# Altium PCB PCB_V1.PcbDoc
Units mil, origin at the board's own origin, x right, y up, seen from the top; angles counter-clockwise.
Board outline 1885.16 x 1885.16 mil, 2 copper layers (Top Layer, Bottom Layer); 25 components, 8 nets, 53 pads, 5 vias.
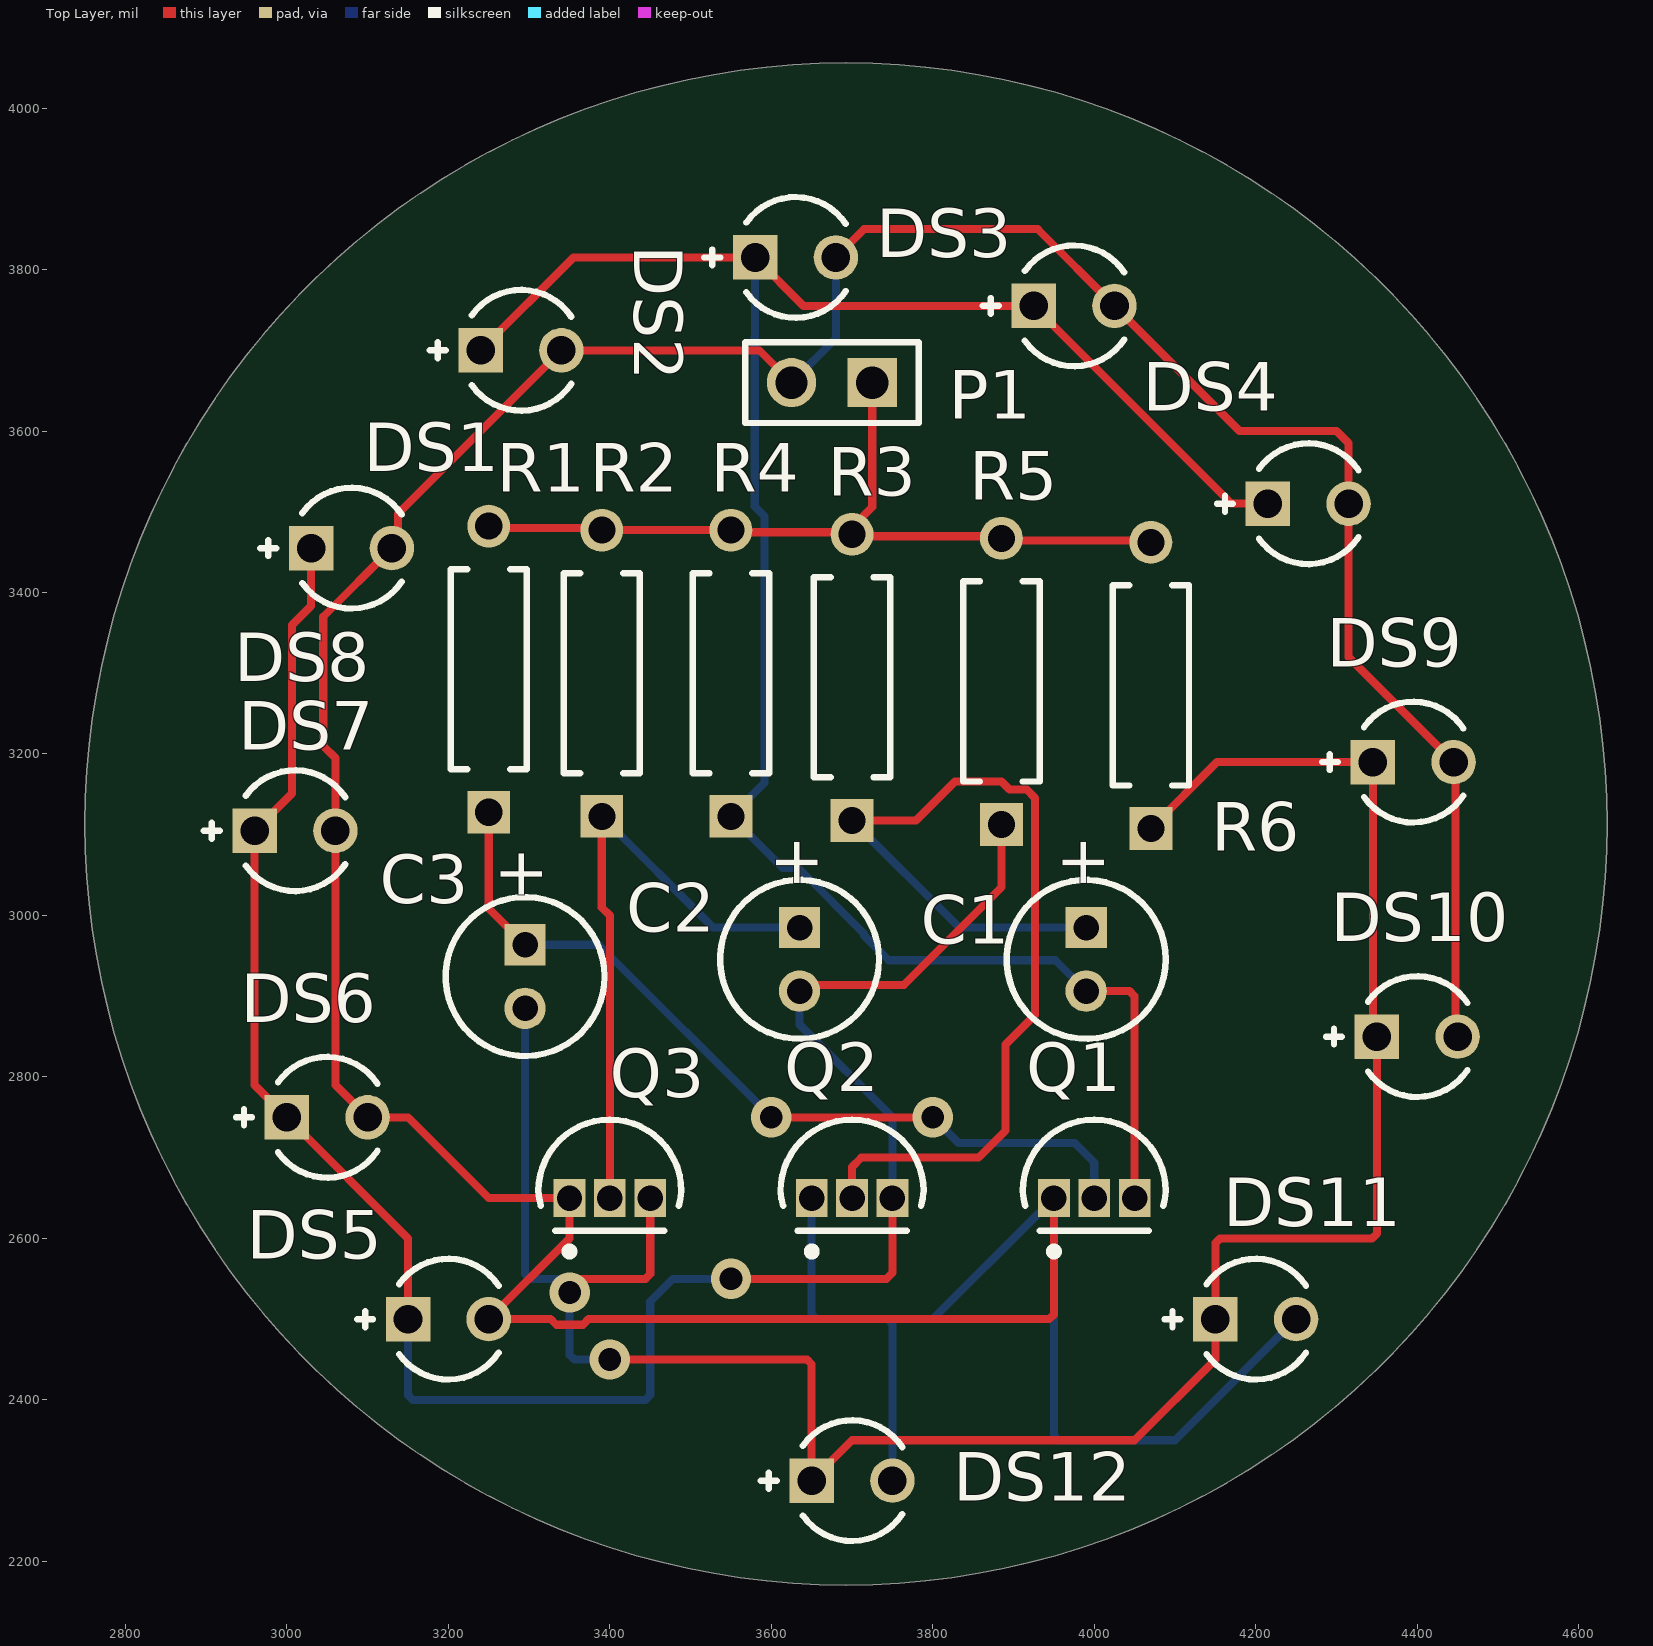
[diagram p0: Top Layer view]
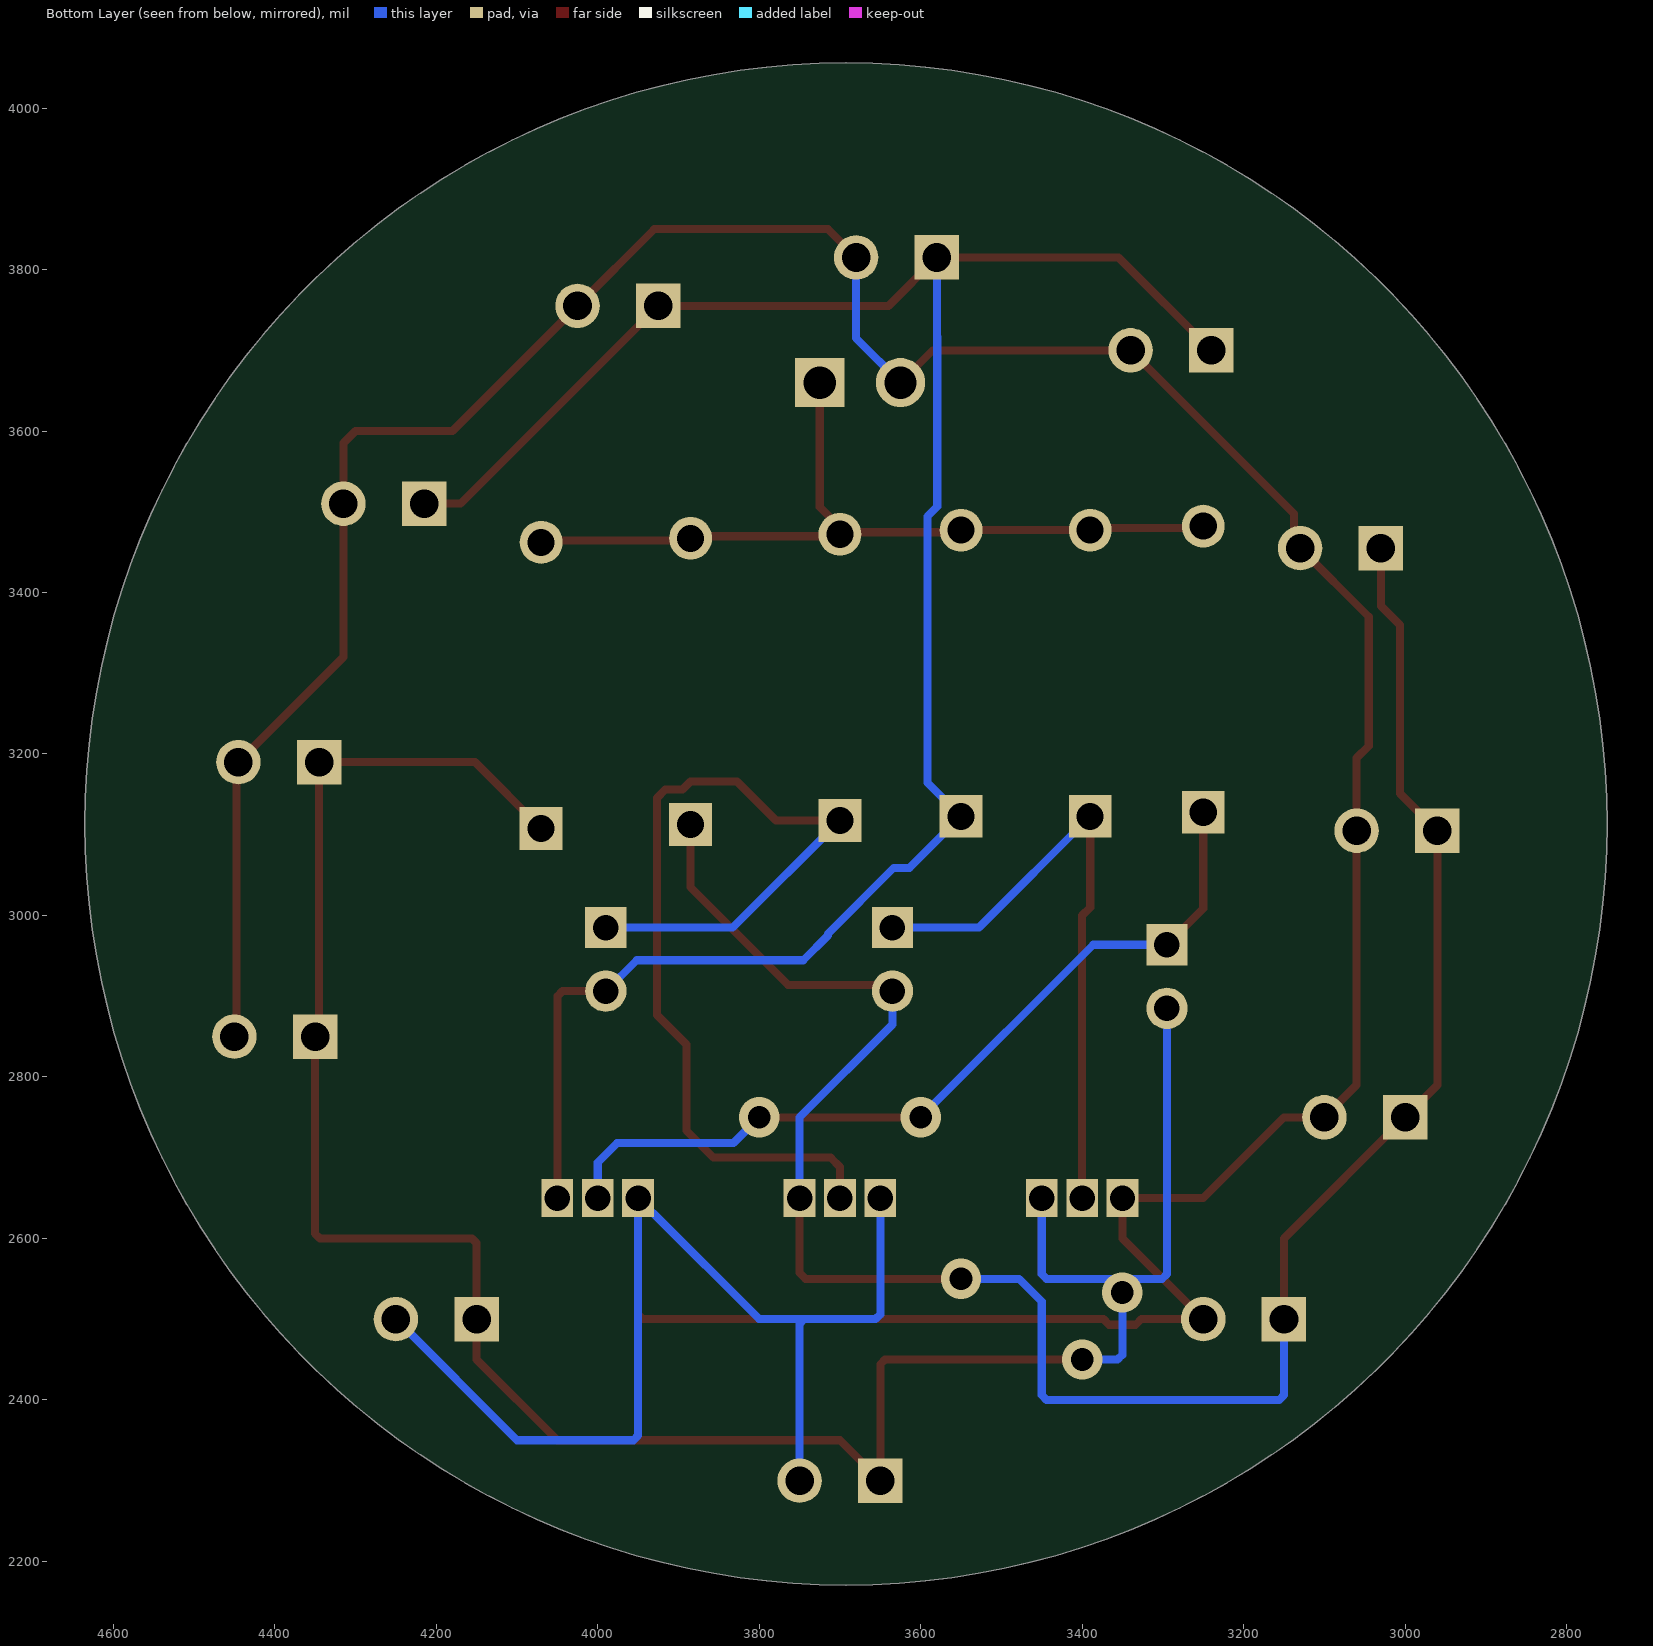
[diagram p1: Bottom Layer view, seen from below]

## Layer stack, top to bottom
Top Solder: solder mask 0.4, Solder Resist, Dk 3.5
Top Layer: signal copper 1.4
Dielectric 1: dielectric 12.6, FR-4, Dk 4.8
Bottom Layer: signal copper 1.4
Bottom Solder: solder mask 0.4, Solder Resist, Dk 3.5

## Board outline
2749.91,3113.29 ccw(c3692.49,3113.29) 3692.49,2170.71 ccw(c3692.49,3113.29) 4635.07,3113.29 ccw(c3692.49,3113.29) 3692.49,4055.87 ccw(c3692.49,3113.29)

## Design rules (kind name [scope] priority, off if disabled: settings)
Clearance [All] p1: gap=10 ignorepadtopadclearanceinfootprint=FALSE
PolygonConnect [All] p1: connectstyle=Relief reliefconductorwidth=10 reliefentries=4 polygonreliefangle="90 Angle" airgapwidth=10
RoutingVias [All] p1: holewidth=28 width=50 viastyle="Through Hole" minholewidth=28 minwidth=50 maxholewidth=28 maxwidth=50
SolderMaskExpansion [All] p1: expansion=4 istentingtop=FALSE
Width [All] p1: maxlimit=10 minlimit=10 preferedwidth=10
30 further rules are at their usual default settings.

## Components (designator, comment, footprint, x,y, rotation, side; value= is the part's Value field where it differs from the comment)
C1 "ECA1HM220" CAPPR55-200-1100X500X1200 3990,2945.63 r270 top value=22µF
C2 "ECA1HM220" CAPPR55-200-1100X500X1200 3635,2945.63 r270 top value=22µF
C3 "ECA1HM220" CAPPR55-200-1100X500X1200 3295,2924.37 r270 top value=22µF
DS1 "LTL-1CHE" INDPR60-254-520X380X650 3290,3700 r0 top
DS2 "LTL-1CHE" INDPR60-254-520X380X650 3630,3815 r0 top
DS3 "LTL-1CHE" INDPR60-254-520X380X650 3975,3755 r0 top
DS4 "LTL-1CHE" INDPR60-254-520X380X650 4265,3510 r0 top
DS5 "LTL-1CHE" INDPR60-254-520X380X650 3200,2500 r0 top
DS6 "LTL-1CHE" INDPR60-254-520X380X650 3050,2750 r0 top
DS7 "LTL-1CHE" INDPR60-254-520X380X650 3010,3105 r0 top
DS8 "LTL-1CHE" INDPR60-254-520X380X650 3080,3455 r0 top
DS9 "LTL-1CHE" INDPR60-254-520X380X650 4395,3190 r0 top
DS10 "LTL-1CHE" INDPR60-254-520X380X650 4400,2850 r0 top
DS11 "LTL-1CHE" INDPR60-254-520X380X650 4200,2500 r0 top
DS12 "LTL-1CHE" INDPR60-254-520X380X650 3700,2300 r0 top
P1 "TSW-102-26-F-S" SMTC-TSW-102-26-XX-S 3725,3660 r180 top
Q1 "S9013" JSCJ-TO-92-3_V 4000,2650 r0 top
Q2 "S9013" JSCJ-TO-92-3_V 3700,2650 r0 top
Q3 "S9013" JSCJ-TO-92-3_V 3400,2650 r0 top
R1 "MFR-25FBF52-10K" RESA60-630X240 3250,3305 r90 top value=10k
R2 "MFR-25FBF52-10K" RESA60-630X240 3390,3300 r90 top value=10k
R3 "MFR-25FBF52-10K" RESA60-630X240 3700,3295 r90 top value=10k
R4 "MFR-25FBF52-10K" RESA60-630X240 3550,3300 r90 top value=330R
R5 "" RESA60-630X240 3885,3290 r90 top value=330R
R6 "330R" RESA60-630X240 4070,3285 r90 top

## Footprints (in the part's own frame and the unit in brackets; to place one, negate y for a bottom-side part, rotate by r counter-clockwise, add the part's x,y. Pads: shape width x height; smd on the part's side, far side on the other; paste and mask are expansions set on the pad)
CAPPR55-200-1100X500X1200 [mm] "THD, 2-Leads, Dia 5mm, Pin Spacing 2mm"
  rect 1.3x1.3 hole 0.8: 1(-1,0)
  round 1.3 hole 0.8: 2(1,0)
  silkscreen extent -2.5,-2.5 2.5,2.5, body extent -2.5,-2.5 2.45,2.5, height 12
INDPR60-254-520X380X650 [mm] "THD, 2-Leads, Dia 3.8mm, Pitch 2.54mm"
  rect 1.4x1.4 hole 0.9: 1(-1.27,0)
  round 1.4 hole 0.9: 2(1.27,0)
  silkscreen extent -2.87,-1.9 1.58,1.9, body extent -1.9,-1.9 1.9,1.9, height 6.5
JSCJ-TO-92-3_V [mm] "TO-92, 3-leads, Height 4.7mm, Pitch 1.27mm"
  rect 1x1.2 hole 0.8: 1(-1.27,0) 2(0,0) 3(1.27,0)
  silkscreen extent -2.25,-1.81 2.25,2.47, body extent -2.25,-1.03 2.25,2.47, height 4.7
RESA60-630X240 [mm] "Axial Resistor, 2-Leads, Dia 2.4mm, Body Length 6.3mm"
  rect 1.35x1.35 hole 0.85: 1(-4.5,0)
  round 1.35 hole 0.85: 2(4.5,0)
  silkscreen extent -3.15,-1.2 3.15,1.2, body extent -4.77,-1.19 4.77,1.2, height 2.4
SMTC-TSW-102-26-XX-S [mm] ".025 SQ Post Terminal Strip Assembly, 1x2 Pins, Vertical, 2.54mm Pitch, Male"
  rect 1.55x1.55 hole 1.02: 1(0,0)
  round 1.55 hole 1.02: 2(2.54,0)
  silkscreen extent -1.46,-1.27 4,1.27, body extent -1.4,-1.27 3.81,1.27, height 8.38

## Part data
C1 C2 C3: library part CMP-001-00027-7, "Aluminum Electrolytic Capacitor, 22 uF, +/- 20%, 50 V, -40 to 85 degC, 2-Pin THD, RoHS, Bulk", Capacitor Type=Electrolytic, Case/Package=Radial, Manufacturer=Panasonic, Max Operating Temperature=85°C, Min Operating Temperature=-40°C, Package Description="2-Pin Radial Lead, Dia 5 mm, Height 12 mm", Package Quantity=200, Package Reference=CAPPR55-200-1100X500X1200, Ripple Current=100mA, Tolerance=20%, Voltage Rating=50V, Datasheet URL=https://industrial.panasonic.com/cdbs/www-data/pdf/RDF0000/ABA0000C1218.pdf, Datasheet Version="Rev. 05, 10/2016", Diameter=5mm, Lead Pitch=2mm, Manufacturer URL=http://www.panasonic.com/, Mounting Technology=TH, Packaging=Bulk, Pins=2, Ripple Current (AC)=100mA, RoHS Compliant=True
DS1 DS2 DS3 DS4 DS5 DS6 DS7 DS8 DS9 DS10 DS11 DS12: library part CMP-007-00018-2, "LED Uni-Color Red, 100 mW, 30 mA, -55 to 100 degC, 2-Pin THD, RoHS, Bulk", Case/Package=Radial, Colour=Red, Forward Current=20mA, Forward Voltage=2V, Manufacturer=Lite-On, Max Operating Temperature=100°C, Min Operating Temperature=-55°C, Package Description="2-Pin Through Hole Device, Dia 3.8 mm, Pitch 2.54 mm", Package Quantity=1000, Datasheet URL=https://datasheet.ciiva.com/15117/getdatasheetpartid-187746-15117985.pdf, Datasheet Version=Dec-03, Illumination Colour=Red, Lens Style=Dome, Luminous Intensity=12.6mcd, Manufacturer URL=http://www.us.liteon.com/, Mounting Technology=TH, Nominal Vf=2V, Package Reference=LTL-1CHE, Packaging=Bulk, Pins=2, RoHS Compliant=True, Viewing Angle=60degrees
P1: library part CMP-1024-00329-1, "0.025\" SQ Post Header, Through-hole, Vertical, -55 to 125 degC, 2.54 mm Pitch, 2-Pin, Male, RoHS", Manufacturer=Samtec, Temperature Range="-55 to 125 degC", ComponentLink1Description="Manufacturer URL", ComponentLink1URL=http://www.samtec.com, ComponentLink2Description=Datasheet, ComponentLink2URL=http://www.samtec.com/documents/webfiles/pdf/TSW_TH.PDF, ComponentLink3Description="Package Specification", ComponentLink3URL=http://www.samtec.com/documents/webfiles/cpdf/TSW-XXX-XX-XXX-X-XX-XXX-MKT.pdf, DatasheetVersion=F-214, Mounting Technology=Through-hole, Orientation=Vertical, PackageDescription=".025[0.64] SQ. Post Terminal Strip Assembly", PackageReference=TSW-102-26-XX-S, PackageVersion="DM, 8/1988", PartNumber=TSW-102-26-F-S, Pitch="2.54 mm", RoHS=True
Q1 Q2 Q3: library part CMP-013-00000-3, "Transistor, NPN, 0.1 uA, 150 MHz, 3-Pin TO-92", Case/Package=TO-92-3, Manufacturer="Jiangsu Changjiang Electronics Technology", Package Description="3-Pin Through Hole Device, Height 4.7 mm, Pitch 2.3 mm", Datasheet URL=http://www.cj-elec.com/txUpfile/20121910315050632.pdf, Datasheet Version="Rev. B, 11/2011", Mounting Technology=TH, Package Reference=TO-92-3, RoHS Compliant=False
R1 R2 R3 R4 R5 R6: library part CMP-009-00047-4, "Axial Resistor, 10 KOhm, +/- 1%, 0.25 W, -55 to 155 degC, 2-Pin THD, RoHS, Bulk", Case/Package=Axial, Manufacturer=Yageo, Max Operating Temperature=155°C, Min Operating Temperature=-55°C, Package Description="2-Pin Axial Lead, Dia 2.4 mm, Body Length 6.3 mm", Package Quantity=200, Package Reference=MFR-25, Power=250mW, Tolerance=1%, Voltage Rating=250V, Datasheet URL=http://www.yageo.com/documents/recent/Yageo%20LR_MFR_2013.pdf, Datasheet Version=Apr-13, Manufacturer URL=http://www.yageo.com/, Mounting Technology=TH, Packaging=Bulk, RoHS Compliant=True

## Via types
v1: diameter 50, hole 28, Top Layer to Bottom Layer, 5 vias

## Nets (pads, with @x,y where several pads share a name; then routed paths per layer and width w, separated by ;. In a path a pad name is that pad's centre, name@x,y a point inside that pad or via, vN(x,y) a via of type N, cw(c..) or ccw(c..) an arc to the next point about the centre after c; other vN are vias at no path point)
NetC1_1: C1.1 Q2.2 R3.1 | length 1274.5
  Top Layer w10: Q2.2 3700,2688.62 3711.38,2700 3856.57,2700 3890,2733.43 3890,2840 3926.57,2876.57 3926.57,3145.62 3916.39,3155.8 3895.18,3155.8 3885,3165.98 3827.36,3165.98 3779.21,3117.83 R3.1
  Bottom Layer w10: R3.1 3832.83,2985 C1.1
NetC1_2: C1.2 DS1.1 DS2.1 DS3.1 DS4.1 Q1.3 R4.1 | length 2707.3
  Top Layer w10: DS1.1 3355,3815 DS2.1 3640,3755 DS3.1 4170,3510 DS4.1 ; C1.2 4043.74,2906.26 4050,2900 Q1.3
  Bottom Layer w10: DS2.1 3580,3717.05 3579.49,3716.54 3579.49,3506.47 3591.57,3494.39 3591.57,3164.41 R4.1 3613.8,3059.03 3633.36,3059.03 3715,2977.39 3715,2975 3745.43,2944.57 3951.69,2944.57 C1.2
NetC2_1: C2.1 Q3.2 R2.1 | length 779.1
  Top Layer w10: R2.1 3390,3010 3400,3000 Q3.2
  Bottom Layer w10: R2.1 3527.83,2985 C2.1
NetC2_2: C2.2 DS5.1 DS6.1 DS7.1 DS8.1 Q2.3 R5.1 | length 2669.9
  Top Layer w10: DS8.1 3030,3383.28 3006.28,3359.56 3006.28,3151.28 DS7.1 2960,2790 DS6.1 3150,2600 DS5.1 ; v1(3550,2550) 3742.49,2550 3750,2557.51 Q2.3 ; C2.2 3642.88,2914.14 3764.14,2914.14 3885,3035 R5.1
  Bottom Layer w10: DS5.1 3150,2405.86 3155.86,2400 3444.14,2400 3450,2405.86 3450,2521.72 3478.28,2550 v1(3550,2550) ; C2.2 3635,2865 3750,2750 Q2.3
NetC3_1: C3.1 Q1.2 R1.1 | length 1043.5
  Top Layer w10: R1.1 3250,3008.74 C3.1 ; v1(3600,2750) v1(3800,2750)
  Bottom Layer w10: C3.1 3386.26,2963.74 v1(3600,2750) ; v1(3800,2750) 3831.76,2718.24 3975.9,2718.24 4000,2694.14 Q1.2
NetC3_2: C3.2 DS9.1 DS10.1 DS11.1 DS12.1 Q3.3 R6.1 | length 3126.1
  Top Layer w10: v1(3350.25,2533.05) 3350,2532.8 3350,2544.14 3355.86,2550 3444.14,2550 3450,2555.86 Q3.3 ; v1(3400,2450) 3644.14,2450 3650,2444.14 DS12.1 3700,2350 4050,2350 4150,2450 DS11.1 4150,2594.14 4155.86,2600 4344.14,2600 4350,2605.86 DS10.1 4345,2855 DS9.1 4152.17,3190 R6.1
  Bottom Layer w10: C3.2 3295,2555.86 3300.86,2550 3444.14,2550 3450,2555.86 Q3.3 ; v1(3350.25,2533.05) 3350.25,2455.86 3356.11,2450 v1(3400,2450)
NetDS1_2: DS1.2 DS2.2 DS3.2 DS4.2 DS5.2 DS6.2 DS7.2 DS8.2 DS9.2 DS10.2 DS11.2 DS12.2 P1.2 Q1.1 Q2.1 Q3.1 | length 5831.8
  Top Layer w10: P1.2 3585,3700 DS1.2 3137.56,3497.56 3137.56,3462.56 DS8.2 3045,3370 3045,3210 3060,3195 DS7.2 3060,2790 DS6.2 3150,2750 3250,2650 Q3.1 3350,2600 DS5.2 3326.74,2500 3333.69,2493.05 3366.82,2493.05 3373.77,2500 3944.14,2500 3950,2505.86 Q1.1 ; DS2.2 3715,3850 3930,3850 DS3.2 4180,3600 4300,3600 4315,3585 DS4.2 4315,3320 DS9.2 4447.5,3187.5 4447.5,2852.5 DS10.2
  Bottom Layer w10: P1.2 3680,3715 DS2.2 ; Q2.1 3650,2505.86 3655.86,2500 3744.14,2500 ; DS12.2 3750,2494.14 3744.14,2500 ; DS11.2 4100,2350 3955.86,2350 3950,2355.86 Q1.1 3950,2646.06 3935.31,2631.38 3931.38,2631.38 3800,2500 3744.14,2500
NetP1_1: P1.1 R1.2 R2.2 R3.2 R4.2 R5.2 R6.2 | length 1026.5
  Top Layer w10: R1.2 3252.5,3479.67 3387.5,3479.67 R2.2 R4.2 3552.5,3474.67 3697.5,3474.67 R3.2 ; P1.1 3725,3505.96 3700,3480.96 R3.2 ; R6.2 4067.5,3464.67 3887.5,3464.67 R5.2 3882.5,3469.67 3702.5,3469.67 R3.2

## Silkscreen, mask and mechanical layers (free items; w line width, h text height)
Mechanical 1:
  circle w10: c3692.49,3113.29 r942.58

## Text inside footprints (layer, text, board x,y; h text height)
C1: Top Overlay "+" at 3960.98,3099.49 h59.06 r270
C2: Top Overlay "+" at 3605.98,3099.49 h59.06 r270
C3: Top Overlay "+" at 3265,3085 h59.06 r270